# Altium PCB MACH CONG SUAT.PcbDoc
Units mil, origin at the board's own origin, x right, y up, seen from the top; angles counter-clockwise.
Board outline 2560 x 2050 mil, 2 copper layers (Top Layer, Bottom Layer); 22 components, 15 nets, 59 pads, 0 vias.
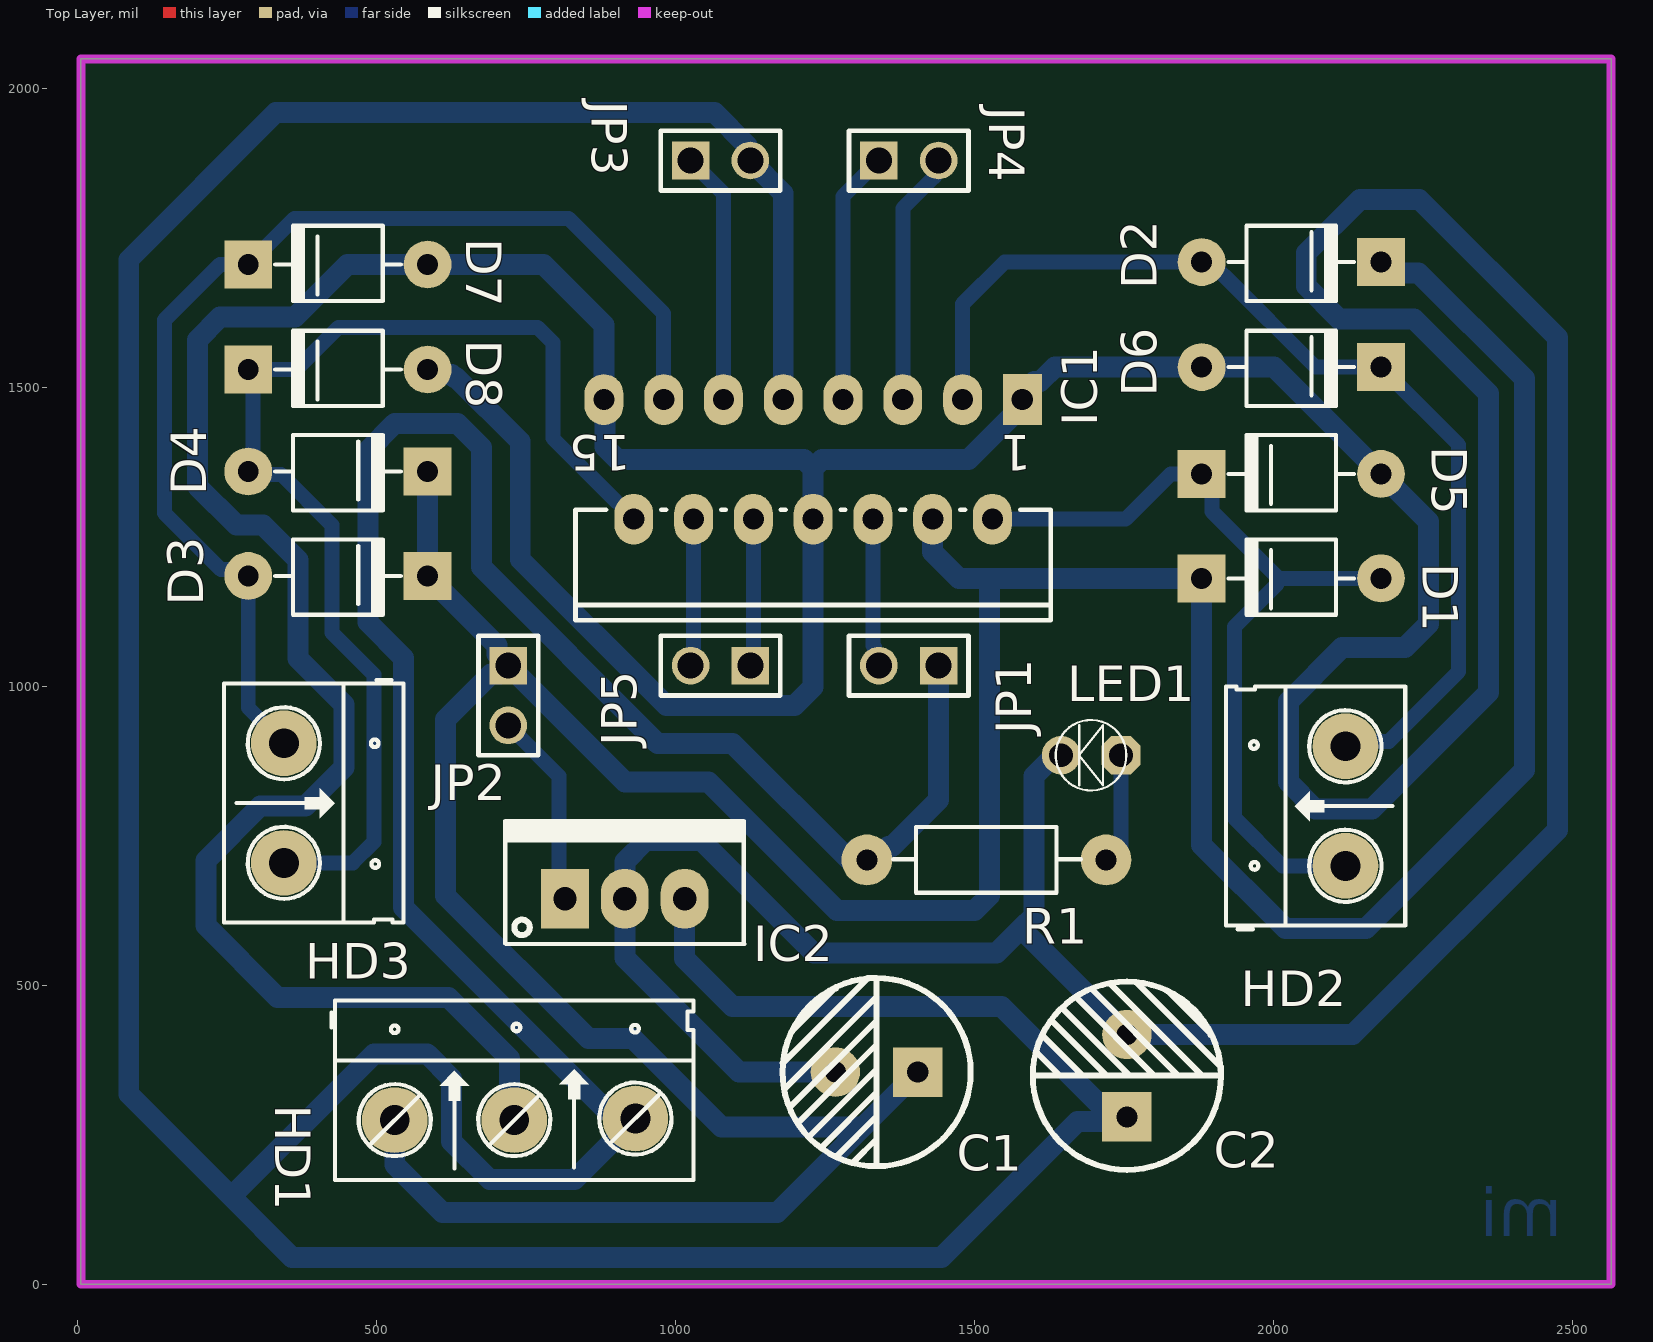
[diagram p0: Top Layer view]
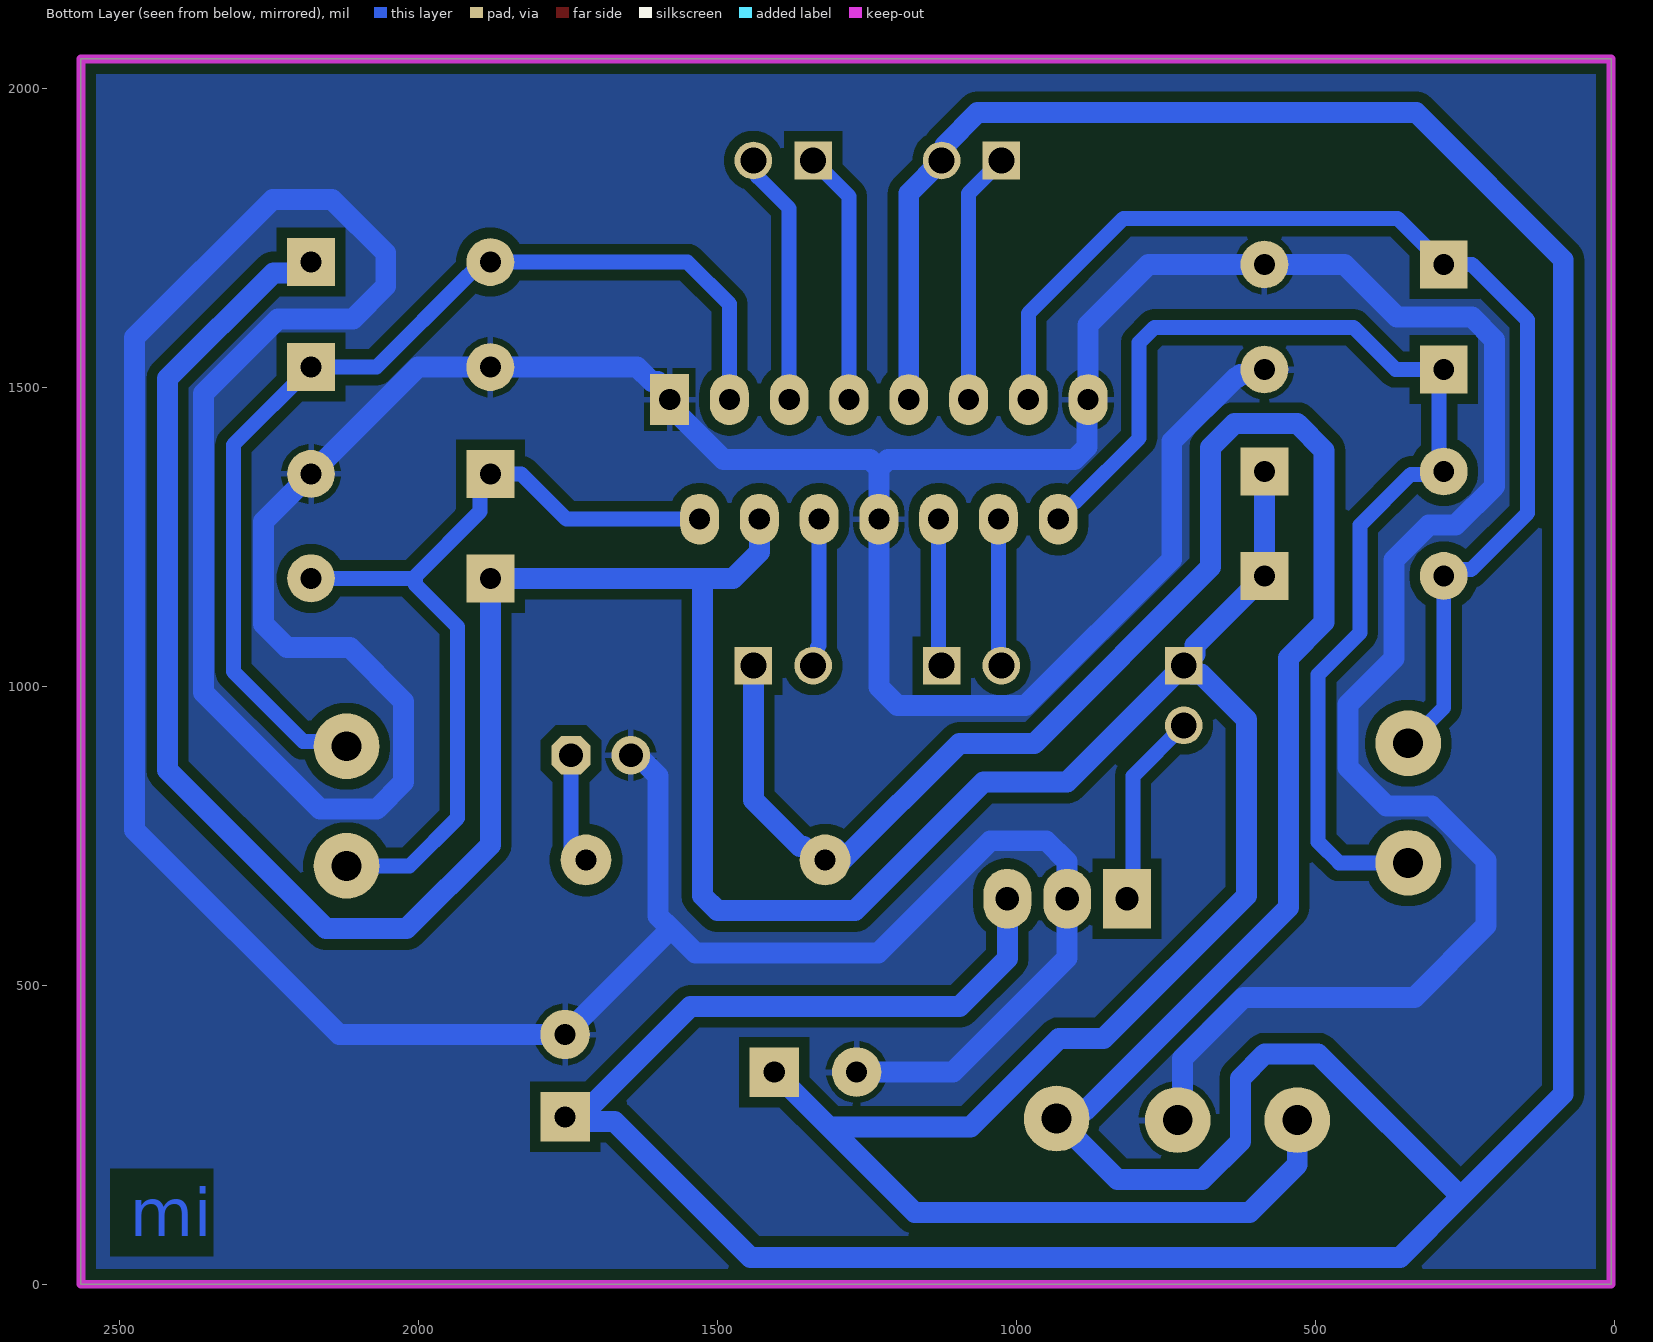
[diagram p1: Bottom Layer view, seen from below]
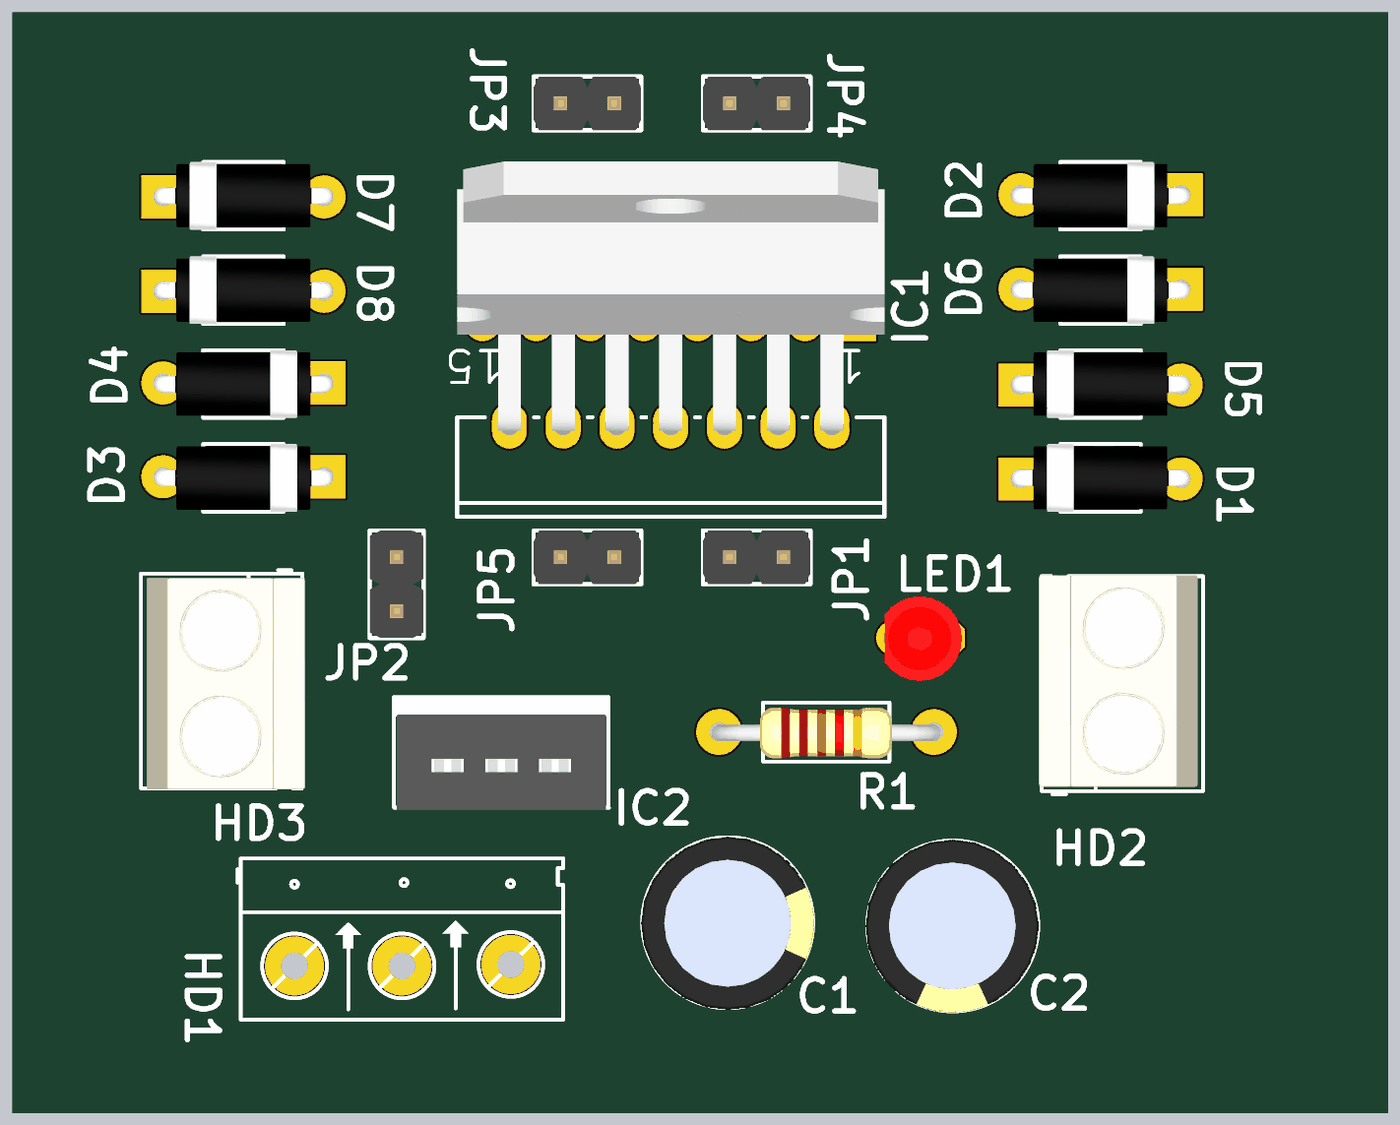
[diagram p2: 3D render of the assembled board from above, using the file's embedded part models]

## Layer stack, top to bottom
Top Solder: solder mask 0.4, Solder Resist, Dk 3.5
Top Layer: signal copper 1.4
Dielectric 1: dielectric 12.6, FR-4, Dk 4.8
Bottom Layer: signal copper 1.4
Bottom Solder: solder mask 0.4, Solder Resist, Dk 3.5

## Board outline
5,0 2565,0 2565,2050 5,2050

## Design rules (kind name [scope] priority, off if disabled: settings)
Clearance Clearance_7 [InNamedPolygon('NONET_L01_P-001')] p1: gap=18 ignorepadtopadclearanceinfootprint=FALSE
Clearance Clearance_6 [InNamedPolygon('NONET_L01_P-001')] p2: gap=708.66 ignorepadtopadclearanceinfootprint=FALSE
Clearance Clearance_5 [InNamedPolygon('NONET_L01_P-001')] p3: gap=18 ignorepadtopadclearanceinfootprint=FALSE
Clearance Clearance_4 [InNamedPolygon('NONET_L01_P-001')] p4: gap=708.66 ignorepadtopadclearanceinfootprint=FALSE
Clearance Clearance_3 [InNamedPolygon('NONET_L01_P-001')] p5: gap=708.66 ignorepadtopadclearanceinfootprint=FALSE
Clearance Clearance_2 [InNamedPolygon('NONET_L01_P-001')] p6: gap=708.66 ignorepadtopadclearanceinfootprint=FALSE
Clearance Clearance_1 [InNamedPolygon('NONET_L01_P-001')] p7: gap=708.66 ignorepadtopadclearanceinfootprint=FALSE
Clearance [All] p8: gap=18 ignorepadtopadclearanceinfootprint=FALSE
PolygonConnect [All] p1: connectstyle=Relief reliefconductorwidth=10 reliefentries=4 polygonreliefangle="90 Angle" airgapwidth=10
RoutingVias [All] p1: holewidth=28 width=50 viastyle="Through Hole" minholewidth=28 minwidth=50 maxholewidth=28 maxwidth=50
SolderMaskExpansion [All] p1: expansion=4 istentingtop=FALSE
Width [All] p1: maxlimit=35 minlimit=10 preferedwidth=25
30 further rules are at their usual default settings.

## Components (designator, comment, footprint, x,y, rotation, side; value= is the part's Value field where it differs from the comment)
C1 "Tu Hoa 220uF 35V 8x12" "tu hoa 8mm" 1336.1,355 r180 top
C2 "Tu Hoa 220uF 35V 8x12" "tu hoa 8mm" 1755,348.9 r90 top
D1 "Diode 1N4007" "DIODE 1A" 2230,1180.98 r0 top
D2 "Diode 1N4007" "DIODE 1A" 1830,1710 r180 top
D3 "Diode 1N4007" "DIODE 1A" 235,1185 r180 top
D4 "Diode 1N4007" "DIODE 1A" 235,1359.67 r180 top
D5 "Diode 1N4007" "DIODE 1A" 2230,1355.66 r0 top
D6 "Diode 1N4007" "DIODE 1A" 1830,1534.34 r180 top
D7 "Diode 1N4007" "DIODE 1A" 635,1705.98 r0 top
D8 "Diode 1N4007" "DIODE 1A" 635,1530.33 r0 top
HD1 "Header 3" HED3 530,274.56 r0 top
HD2 "Header 2" HED2 2120.5,700 r90 top
HD3 "Header 2" HED2 344.5,905 r270 top
IC1 "L298" DIP15SL2 1230,1380 r180 top (schematic designator IC2)
IC2 "LM78xx" TO220-123 815,645 r0 top
JP1 "JP 1x2 2.54" "JP 1x2 DT" 1440,1035 r180 top
JP2 "JP 1x2 2.54" "JP 1x2 DT" 720,1035 r270 top
JP3 "JP 1x2 2.54" "JP 1x2 DT" 1025,1880 r0 top
JP4 "JP 1x2 2.54" "JP 1x2 DT" 1340,1880 r0 top
JP5 "JP 1x2 2.54" "JP 1x2 DT" 1125,1035 r180 top
LED1 "LED" LED-3MM-RED 1745,885 r180 top value="LED 3 ly Single Colour"
R1 "1k" R1/2W 1720,710 r180 top value="R1/4W - 1K"

## Footprints (in the part's own frame and the unit in brackets; to place one, negate y for a bottom-side part, rotate by r counter-clockwise, add the part's x,y. Pads: shape width x height; smd on the part's side, far side on the other; paste and mask are expansions set on the pad)
"DIODE 1A" [mil] "Diode 1A"
  round 80 hole 35: 1(-50,0)
  rect 80x80 hole 35: 2(-350,0)
  silkscreen extent -305,-61 -95,65, body extent -366,-61 -34,65, height 122
DIP15SL2 [mil] "TO, Thru-Hole, Vertical, Heatsink Mounted; 15 Bent Staggered Leads; Pitch 1.27 mm"
  rect 65x85 hole 35.43: 1(-350,-100)
  oval 65x85 hole 35.43: 2(-300,100) 3(-250,-100) 4(-200,100) 5(-150,-100) 6(-100,100) 7(-50,-100) 8(0,100) 9(50,-100) 10(100,100) 11(150,-100) 12(200,100) 13(250,-100) 14(300,100) 15(350,-100)
  silkscreen extent -398,84 398,269, body extent -398,-392 397,140, height 814
HED2 [mil] "Header 2, 2 pin, hight 300mil, Pin to Pin 200, Colour Green"
  round 110 hole 50: 1(0,0) 2(200,0)
  silkscreen extent -106,-100 300,200, body extent -92,-90 302,205, height 394
HED3 [mil] "Header 3, 3 pin, hight 300mil, Pin to Pin 200, Colour Green"
  round 110 hole 50: 1(0,0) 2(200,0) 3(402.62,2.62)
  silkscreen extent -106,-100 500,200
"JP 1x2 DT" [mm] "2 pins, 1 row, straight, gold plating"
  rect 1.6x1.6 hole 1.1: 1(0,0)
  round 1.6 hole 1.1: 2(2.54,0)
  silkscreen extent -1.27,-1.27 3.81,1.27, body extent -1.27,-1.27 3.81,1.27, height 8.54
LED-3MM-RED [mil]
  oct 65x65 hole 40: 1(0,0)
  round 65 hole 40: 2(100,0)
  silkscreen extent -9,-59 109,59, body extent -27,-77 117,80, height 181
R1/2W [mil] "R 1/2W, 2 pin, 300mil"
  round 85 hole 35: 1(0,0) 2(400,0)
  silkscreen extent 42,-55 356,55, body extent -12,-45 414,49, height 91
TO220-123 [mil] "TO-220 - 1-2-3"
  rect 80x100 hole 39: 1(0,0)
  oval 80x100 hole 39: 2(100,0) 3(200,0)
  silkscreen extent -100,-76 300,130, body extent -95,-80 295,97, height 323
"tu hoa 8mm" [mm]
  rect 2.1x2.1 hole 0.9: 1(-1.75,0)
  round 2.1 hole 0.9: 2(1.75,0)
  silkscreen extent -4,-4 4,4, body extent -4.1,-4.07 4.1,4.13, height 13.81

## Part data
C1 C2: library part CMP-001-00419-1, "C?m", Chung_Loai=C?m, Component Type=Standard, Design Item ID="Tu Hoa 220uF 35V 8x12", Don_Vi=Con, Ma_Hang=MH006553, Pins=2, So_Chan=2, Source="Tu dien.SchLib", Ten_Linh_Kien="T? Hóa 220uF 35V 8x12MM"
D1 D2 D3 D4 D5 D6 D7 D8: library part CMP-004-00055-1, "C?m", Chung_Loai=C?m, Component Type=Standard, Design Item ID="Diode 1N4007", Don_Vi=Con, Ma_Hang=MH001063, Pins=2, Source=Diode.SchLib, Ten_Linh_Kien="Diode 1N4007 1A (DIP)"
HD1: library part Hed3, "Header 3 (Green)"
HD2 HD3: library part Hed2, "Header 2 (Green)"
IC1: library part LM78xx, "Positive Voltage Regulator", ComponentLink1Description="Manufacturer Link", ComponentLink1URL=http://www.st.com/, ComponentLink2Description=Datasheet, ComponentLink2URL=http://www.st.com/stonline/products/literature/ds/2146/l78m05c.pdf, DatasheetVersion=Apr-1994, LatestRevisionDate=17-Jul-2002, LatestRevisionNote="Re-released for DXP Platform.", Note="Tab is connected to pin 3 (GND).", PackageDescription="TO, Thru-Hole, Vertical, Heatsink Mounted; 3 In-Line Leads; Pitch 2.54 mm; Pin sequence 1, 3, 2", PackageReference=ISOWATT220AB, PackageVersion=Jul-1998, Published=24-Aug-2001, Publisher="Altium Limited"
IC2: library part L298, "Dual Full-H Driver", ComponentLink1Description="Manufacturer Link", ComponentLink1URL=http://www.ti.com/, DatasheetVersion=Jun-1990, Note="The tab is elec is connected to GND pin", PackageDescription="TO, Thru-Hole, Vertical, Heatsink Mounted; 15 Bent Staggered Leads; Pitch 1.27 mm", PackageReference=KV015, Published=15-May-2002, Publisher="Altium Limited"
JP1 JP2 JP3 JP4 JP5: library part "JP 1x2 2.54 Duc Thang", "Cắm", Chung_Loai=Cắm, Don_Vi=Con, Ma_Hang=MH000903, Ten_Linh_Kien="Jump Đơn Đực 2.54MM 1x40P Thẳng 11MM"
LED1: "LED Single colour Green and Red"
R1: library part R1/4W, "Resistor 1/4W"

## Nets (pads, with @x,y where several pads share a name; then routed paths per layer and width w, separated by ;. In a path a pad name is that pad's centre, name@x,y a point inside that pad or via, vN(x,y) a via of type N, cw(c..) or ccw(c..) an arc to the next point about the centre after c; other vN are vias at no path point)
7-35V: C1.1 D1.2 D2.2 D3.2 D4.2 HD1.1 IC1.4 JP2.1 | length 6925.1
  Bottom Layer w35: HD1.1 530,200 610,120 1170,120 1313,263 ; D4.2 D3.2 701,1069 701,1054 JP2.1 ; C1.1 1313,263 ; IC1.4 1430,1225 1474.02,1180.98 1525,1180.98 ; D2.2 2197.86,1692.14 2242.86,1692.14 2420,1515 2420,860 2155,595 2020,595 1880,735 D1.2 1525,1180.98 ; JP2.1 915,840 1055,840 1270,625 1500,625 1525,650 1525,1180.98 ; JP2.1 706,1021 691,1021 615,945 615,650 854,411 929,411 1077,263 1313,263
+5: C2.1 HD1.3 IC1.9 IC2.3 JP1.1 JP3.2 R1.2 | length 9759.7
  Bottom Layer w35: IC2.3 1015,545 1095,465 1545,465 C2.1@1730,280 ; IC1.9 1180,1825 JP3.2 1119.64,1885.36 1119.64,1905.36 1065,1960 331,1960 85,1714 85,318 256.5,146.5 ; R1.2@1291.43,708.57 1095,905 970,905 675,1200 675,1400 635,1440 530,1440 485,1395 485,1107.5 545,1047.5 545,630 883.47,291.53 918.27,291.53 HD1.3 830.44,175 689,175 625,239 625,344.5 584.5,385 495,385 256.5,146.5 ; R1.2@1297.5,714.64 R1.2@1298.52,713.63 ; R1.2@1301.43,728.57 R1.2 1333.53,710 1355.7,732.18 1362.18,732.18 1440,810 JP1.1 ; C2.1 1747.5,272.5 1672.5,272.5 1445,45 358,45 256.5,146.5
GND: C1.2 C2.2 D5.1 D6.1 D7.1 D8.1 HD1.2 IC1.1 IC1.8 IC1.15 IC2.2 LED1.2 | length 12029
  Bottom Layer w35: D8.1 593.61,1521.72 625.43,1521.72 629.89,1517.26 632.74,1517.26 740,1410 740,1212.71 984.71,968 1199,968 1230,999 IC1.8 1230,1365 ; HD1.2 722.31,282.25 722.31,377.69 620,480 334,480 214,600 214,709 305,800 380.5,800 445,864.5 445,970 368,1047 368,1212 310,1270 265,1270 200,1335 200,1580 238,1618 363,1618 450.98,1705.98 D7.1 779.02,1705.98 880,1605 IC1.15 882,1478 882,1400.5 902.5,1380 1215,1380 1230,1365 ; C1.2 1106,355 915,546 IC2.2 915,707 950,742 1043,742 1231,554 1536.9,554 1577.85,594.95 ; LED1.2 1634.18,885 1599.18,850 1599.18,616.28 1577.85,594.95 ; 1230,1365 1245,1380 1490,1380 1580,1470 IC1.1 1580,1490 1600,1510 1610,1510 1634.34,1534.34 D6.1 2001.31,1534.34 D5.1 2259.64,1276.01 2259.64,1104.64 2220,1065 2115,1065 2025,975 2025,840 2070,795 2165,795 2360,990 2360,1490 2235,1615 2110,1615 2055,1670 2055,1725 2145,1815 2244,1815 2475,1584 2475,760 2132.8,417.8 C2.2 1577.85,594.95
NetD1_1: D1.1 D5.2 HD2.1 IC1.2 | length 1431.4
  Bottom Layer w25: IC1.2 1752.62,1280 1828.28,1355.66 D5.2 1897.2,1338.46 1897.2,1292.8 2005,1185 2005,1170 1935,1100 1935,780 2015,700 HD2.1 ; 2005,1180.98 D1.1
NetD2_1: D2.1 D6.2 HD2.2 IC1.3 | length 1766.2
  Bottom Layer w25: IC1.3 1480,1640 1550,1710 1894.88,1710 1917.18,1687.7 1917.3,1687.7 2070.66,1534.34 D6.2 2310,1404.34 2310,1025 2193.16,908.16 2128.66,908.16 HD2.2
NetD3_1: D3.1 D7.2 HD3.1 IC1.13 | length 1926.6
  Bottom Layer w25: HD3.1 285,964.5 D3.1 274.48,1195.52 239.48,1195.52 145,1290 145,1613.3 237.68,1705.98 D7.2 362.02,1783 821,1783 980,1624 IC1.13
NetD4_1: D4.1 D8.2 HD3.2 IC1.14 | length 1933.6
  Bottom Layer w25: D8.2 D8.2@292.57,1530.33 ; HD3.2 460,705 495,740 495,1020 425,1090 425,1270 339.96,1355.04 289.64,1355.04 D4.1 292.57,1367.25 D8.2@292.57,1530.33 ; 900.11,1309.89 794.5,1415.5 794.5,1575.5 769,1601 436,1601 365.33,1530.33 D8.2@292.57,1530.33
NetIC1_5: IC1.5 JP4.2 | length 424.9
  Bottom Layer w25: IC1.5 1380,1800 1432.73,1852.73 1432.73,1872.73 JP4.2
NetIC1_6: IC1.6 JP1.2 | length 249.1
  Bottom Layer w25: IC1.6 1330,1068.64 1332.73,1065.91 1332.73,1042.27 JP1.2
NetIC1_7: IC1.7 JP4.1 | length 424.9
  Bottom Layer w25: IC1.7 1280,1820 JP4.1
NetIC1_10: IC1.10 JP5.1 | length 247.1
  Bottom Layer w25: JP5.1 1130,1040 IC1.10
NetIC1_11: IC1.11 JP3.1 | length 422.8
  Bottom Layer w25: JP3.1 1080,1825 IC1.11
NetIC1_12: IC1.12 JP5.2 | length 247.1
  Bottom Layer w25: JP5.2 1030,1040 IC1.12
NetIC2_1: IC2.1 JP2.2 | length 329.4
  Bottom Layer w25: JP2.2 805,850 805,655 IC2.1
NetLED1_1: LED1.1 R1.1 | length 229.5
  Bottom Layer w25: R1.1@1710,686.24 1745,721.24 LED1.1 ; R1.1@1720,690 R1.1@1720,706.24

## Polygon pours and split planes (outlines as drawn)
GND on Bottom Layer "NONET_L01_P-001" (solid, remove dead copper, pour order 1): 10,2050 10,10 5,5 10,0 2565,0 2565,2050

## Keep-outs
Keep-Out Layer:
  lines w15: 2564.06,0 5,0 5,2050 2564.06,2050 ; 2565,0 2565,2050

## Other copper
Bottom Layer:
  text "mi" at 2483.32,80.01 h80

## Text inside footprints (layer, text, board x,y; h text height)
IC1: Top Overlay "15" at 925,1420 h59.06 r180; Top Overlay "1" at 1595,1420 h59.06 r180